# Altium PCB Anlogic Eagle FPGA E104 V2.0封装图.PcbDoc
Units mil, origin at the board's own origin, x right, y up, seen from the top; angles counter-clockwise.
Board outline 3078.86 x 1897.76 mil, 6 copper layers (TOP, L2_GND, L3_S, L4_P, L5_G, BOTTOM), stack 56.8 mil thick; 6 components, 104 nets, 145 pads, 0 vias.
Unrouted connection lines stored in the file: 7.
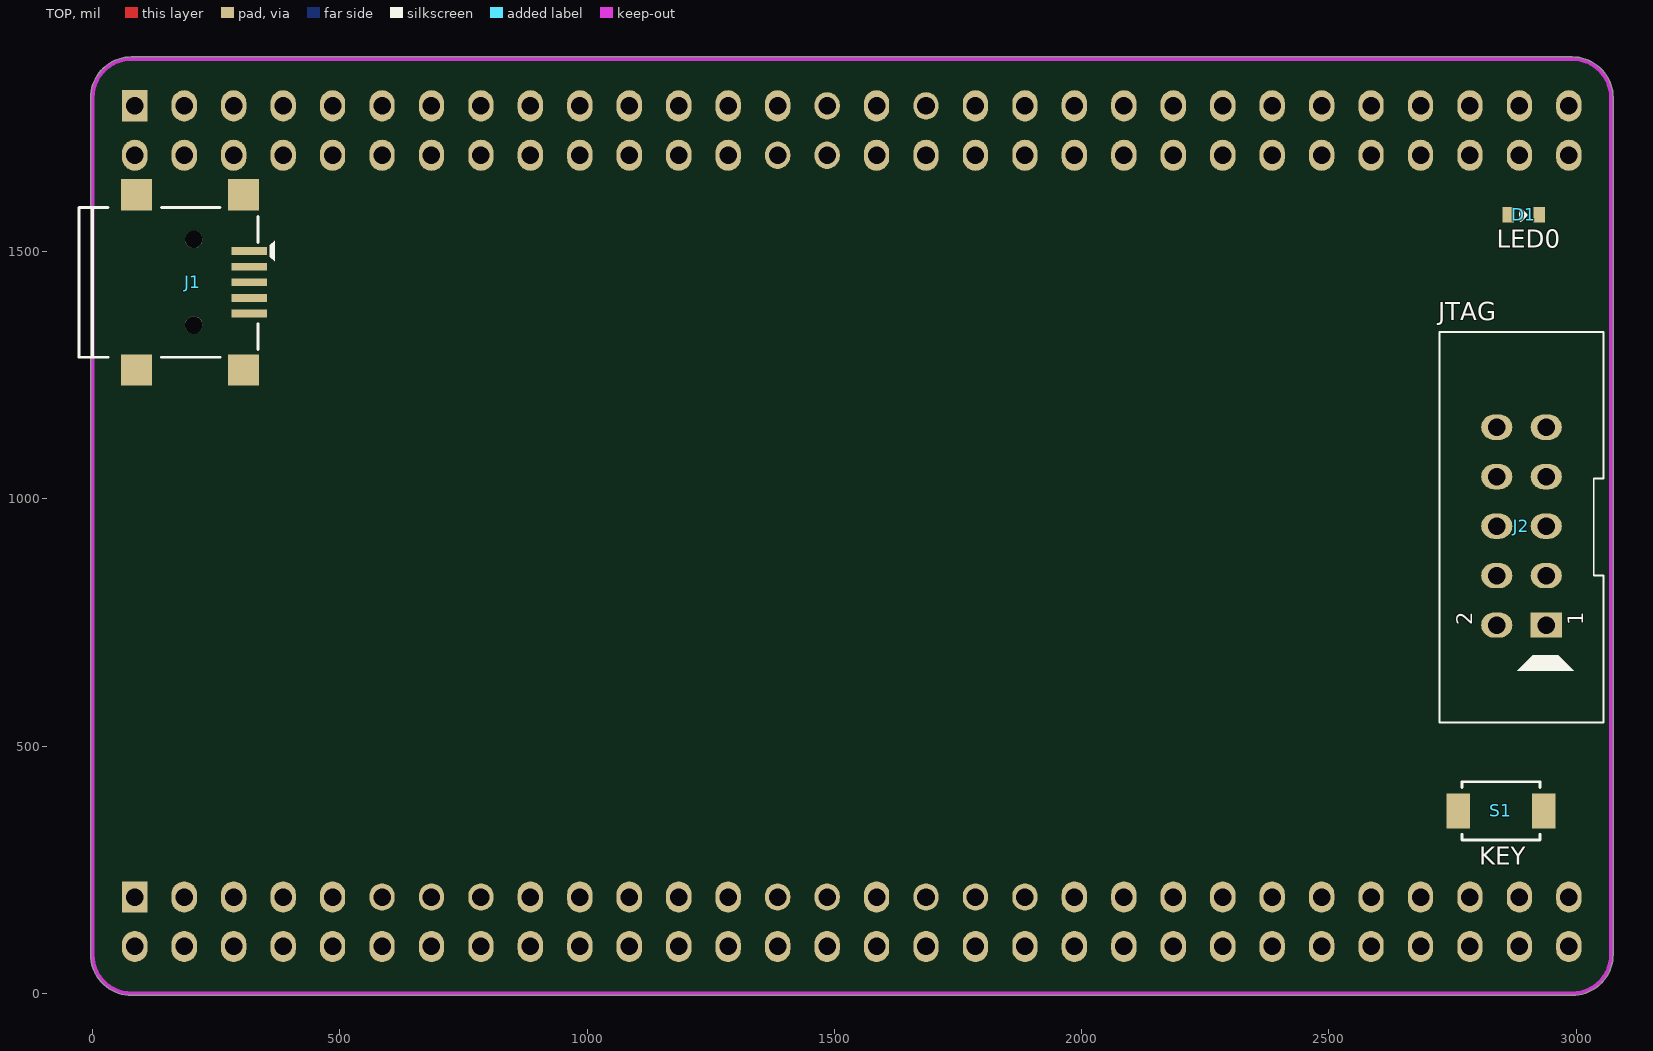
[diagram p0: TOP view]
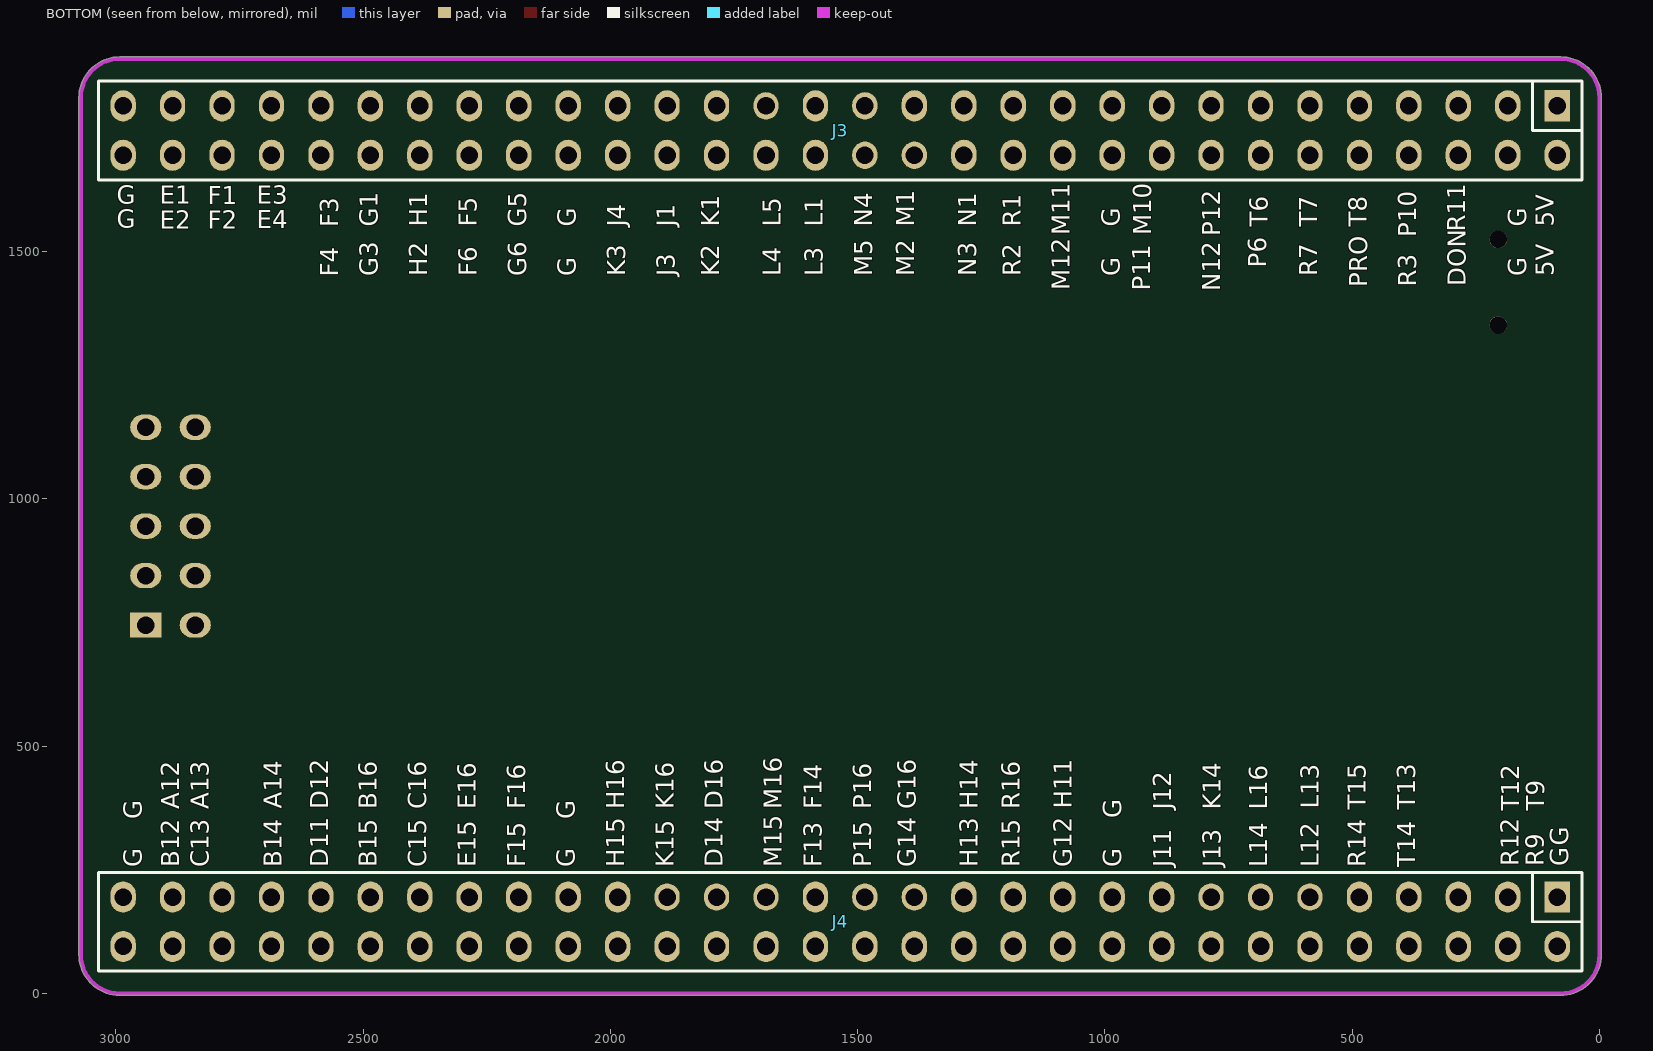
[diagram p1: BOTTOM view, seen from below]
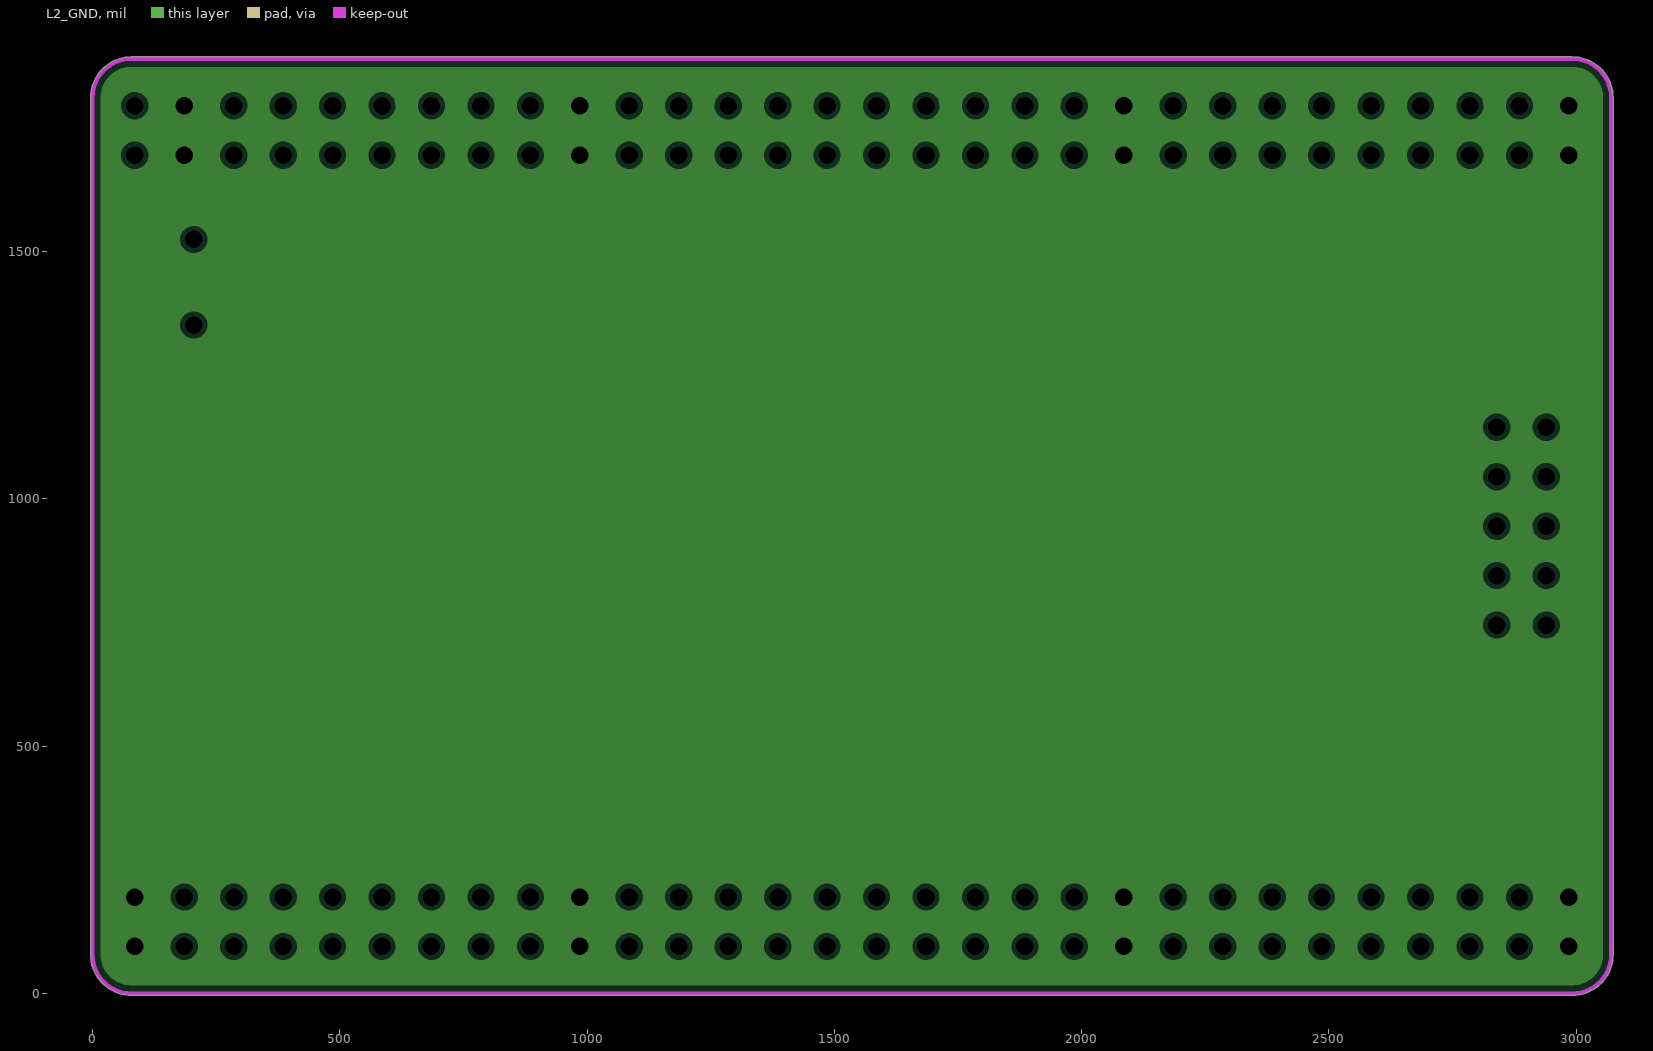
[diagram p2: L2_GND, clearances drawn from the general rule]
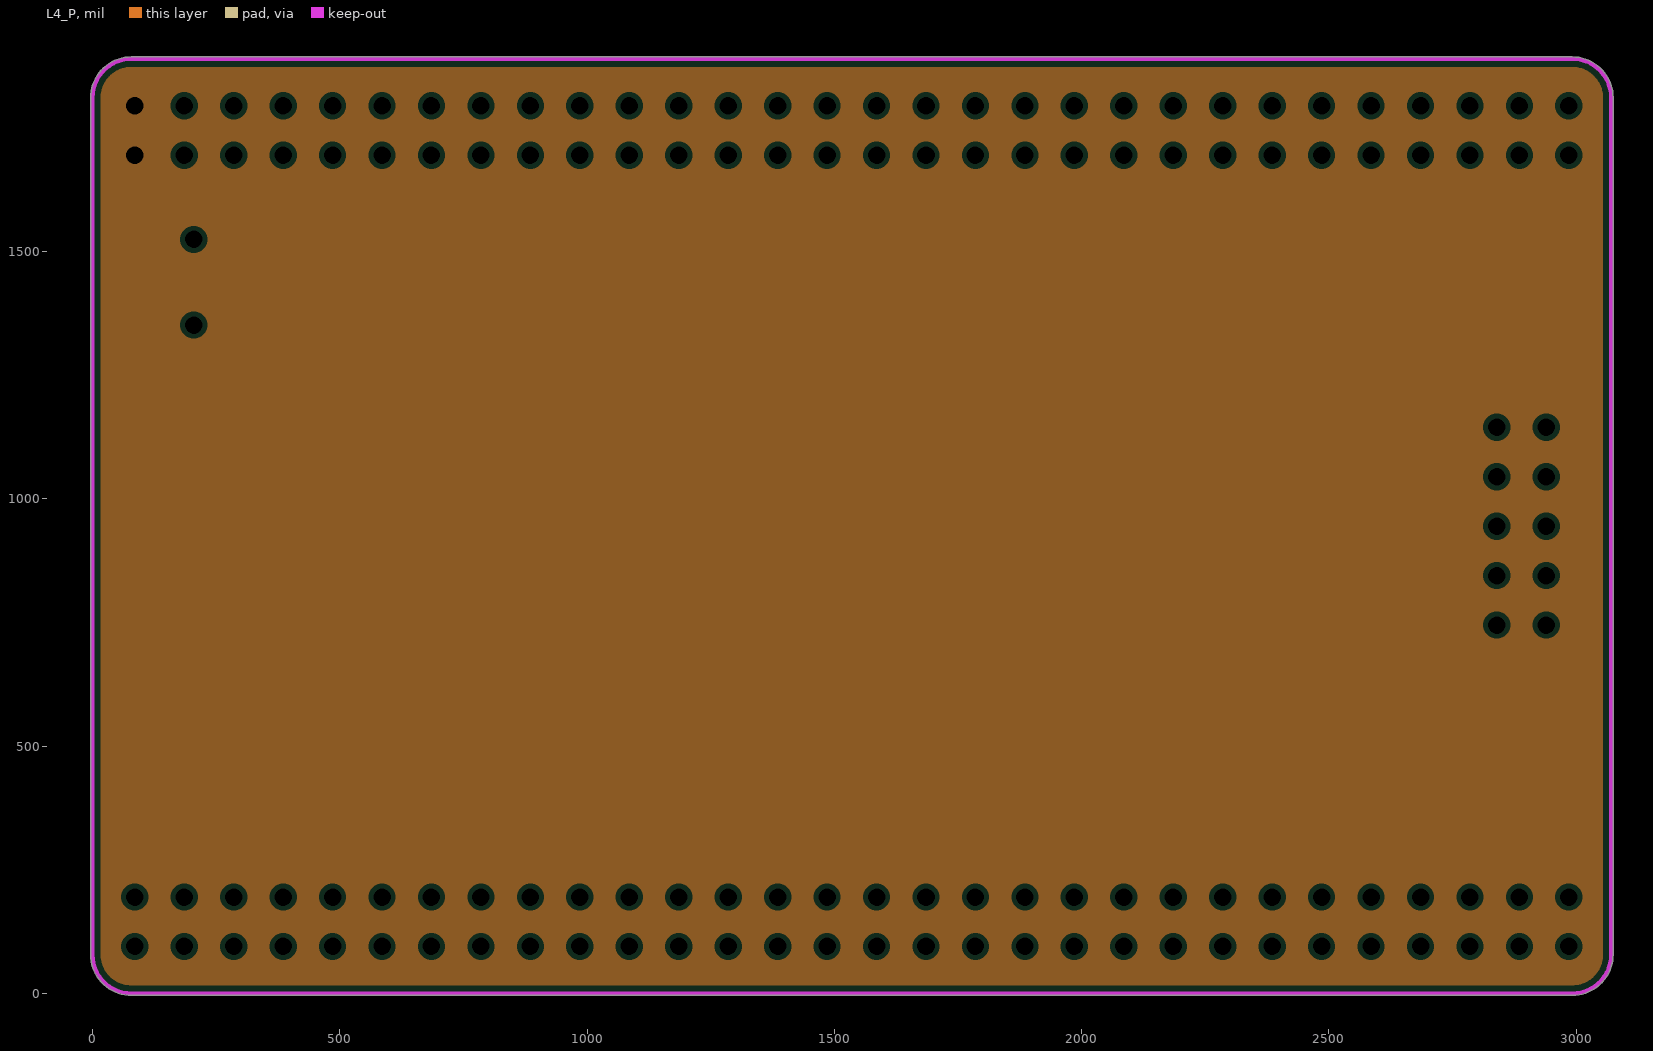
[diagram p3: L4_P, clearances drawn from the general rule]
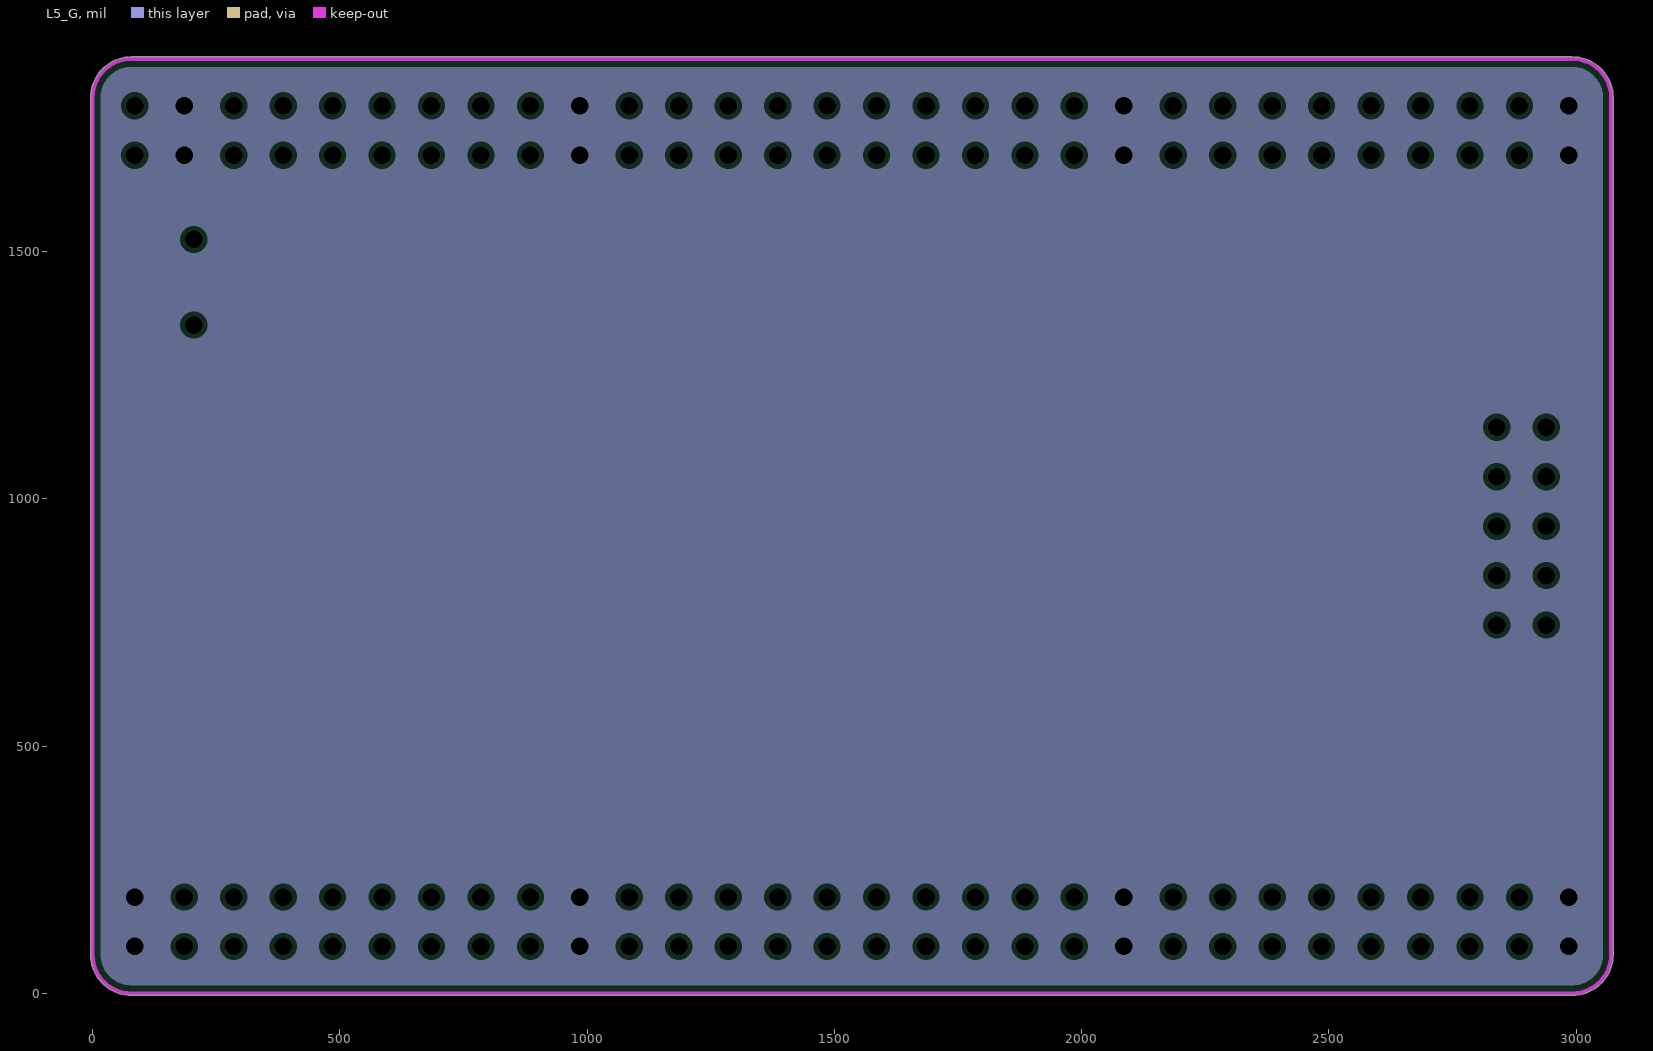
[diagram p4: L5_G, clearances drawn from the general rule]

## Layer stack, top to bottom
TOP: signal copper 1.2
Dielectric: core 3.2, FR-4, Dk 4.5
L2_GND: plane copper 1.4, net GND
Dielectric: prepreg 12.6, FR-4, Dk 4.8
L3_S: signal copper 1.2
Dielectric: core 8, FR-4, Dk 4.5
L4_P: plane copper 1.4, net +5V
Dielectric: prepreg 12.6, FR-4, Dk 4.8
L5_G: plane copper 1.4, net GND
Dielectric: core 12.6, FR-4, Dk 4.8
BOTTOM: signal copper 1.2

## Board outline
-4,78.74 ccw(c78.74,78.74) 78.74,-4 2992.12,-4 ccw(c2992.12,78.74) 3074.86,78.74 3074.86,1811.02 ccw(c2992.12,1811.02) 2992.12,1893.76 78.74,1893.76 ccw(c78.74,1811.02) -4,1811.02

## Design rules (kind name [scope] priority, off if disabled: settings)
Clearance Clearance_1 [IsRegion] p1: gap=13.78
Clearance [All] p2: gap=5
ComponentClearance [All] p1 off: gap=10 collisioncheckmode=3 verticalgap=10 showdistances=FALSE
HoleSize [All] p1: absolutevalues=TRUE maxlimit=320 minlimit=8 maxpercent=80.000 minpercent=20.000
MinimumSolderMaskSliver [All] p1 off: minsoldermaskwidth=10
PlaneClearance [All] p1: clearance=9.84
PlaneConnect [All] p1: planeconnectstyle=Direct reliefexpansion=20 reliefentries=4 reliefconductorwidth=10 reliefairgap=10
PolygonConnect [All] p1: connectstyle=Direct reliefconductorwidth=10 reliefentries=4 polygonreliefangle="90 Angle"
RoutingVias [All] p1: holewidth=8 width=18 viastyle="Through Hole" minholewidth=8 minwidth=18 maxholewidth=160 maxwidth=320
SilkToSilkClearance [All] p1 off: silktosilkclearance=10
SilkscreenOverComponentPads [All] p1 off: minsilkscreentomaskgap=10
SolderMaskExpansion [All] p1 off: expansion=4
Width [All] p1: maxlimit=100 minlimit=4 preferedwidth=5 minimp=52.760000 maximp=52.930000 favimp=44.990000
21 further rules are at their usual default settings.

## Classes and differential pairs
component class "PAGE09 Connectors": J3 J4
component class "PAGE08 System Power": J1
component class "PAGE05 FPGA Config": D1 J2 S1

## Components (designator, comment, footprint, x,y, rotation, side; value= is the part's Value field where it differs from the comment)
D1 "GREEN" Q0603 2894.07,1574.28 r0 top
J1 "MINI USB" MINIUSB-AB-SM 163.19,1437.99 r270 top
J2 "CONN 5x2" DIP10-2P54-I 2888.45,943.7 r90 top
J3 "CONN PLUG 30x2" DIP2X30_2P54#1 1534.43,1744.88 r180 bottom
J4 "CONN PLUG 30x2" DIP2X30_2P54#2 1534.43,144.88 r180 bottom
S1 "FSMRA2JH" SMD_3X4X2MM 2847.98,368.99 r0 top

## Footprints (in the part's own frame and the unit in brackets; to place one, negate y for a bottom-side part, rotate by r counter-clockwise, add the part's x,y. Pads: shape width x height; smd on the part's side, far side on the other; paste and mask are expansions set on the pad)
DIP2X30_2P54#1 [mm] "DIP2X30_2P54"
  rect 1.3x1.6 hole 0.9: 1(36.805,1.27)
  oval 1.3x1.6 hole 0.9: 2(36.805,-1.27) 3(34.265,1.27) 4(34.265,-1.27) 5(31.725,1.27) 6(31.725,-1.27) 7(29.185,1.27) 8(29.185,-1.27) 9(26.645,1.27) 10(26.645,-1.27) 11(24.105,1.27) 12(24.105,-1.27) 13(21.565,1.27) 14(21.565,-1.27) 15(19.025,1.27) 16(19.025,-1.27) 17(16.485,1.27) 18(16.485,-1.27) 19(13.945,1.27) 20(13.945,-1.27) 21(11.405,1.27) 22(11.405,-1.27) 23(8.865,1.27) 24(8.865,-1.27) 25(6.325,1.27) 26(6.325,-1.27) 27(3.785,1.27) 31(-1.295,1.27) 32(-1.295,-1.27) 34(-3.835,-1.27) 35(-6.375,1.27) 36(-6.375,-1.27) 37(-8.915,1.27) 38(-8.915,-1.27) 39(-11.455,1.27) 40(-11.455,-1.27) 41(-13.995,1.27) 42(-13.995,-1.27) 43(-16.535,1.27) 44(-16.535,-1.27) 45(-19.075,1.27) 46(-19.075,-1.27) 47(-21.615,1.27) 48(-21.615,-1.27) 49(-24.155,1.27) 50(-24.155,-1.27) 51(-26.695,1.27) 52(-26.695,-1.27) 53(-29.235,1.27) 54(-29.235,-1.27) 55(-31.775,1.27) 56(-31.775,-1.27) 57(-34.315,1.27) 58(-34.315,-1.27) 59(-36.855,1.27) 60(-36.855,-1.27)
  oval 1.3x1.4 hole 0.9: 28(3.785,-1.27) 29(1.245,1.27) 30(1.245,-1.27) 33(-3.835,1.27)
  silkscreen extent -38.13,-2.54 38.07,2.54
DIP2X30_2P54#2 [mm] "DIP2X30_2P54"
  rect 1.3x1.6 hole 0.9: 1(36.805,1.27)
  oval 1.3x1.6 hole 0.9: 2(36.805,-1.27) 3(34.265,1.27) 4(34.265,-1.27) 5(31.725,1.27) 6(31.725,-1.27) 7(29.185,1.27) 8(29.185,-1.27) 9(26.645,1.27) 10(26.645,-1.27) 12(24.105,-1.27) 14(21.565,-1.27) 16(19.025,-1.27) 17(16.485,1.27) 18(16.485,-1.27) 19(13.945,1.27) 20(13.945,-1.27) 21(11.405,1.27) 22(11.405,-1.27) 23(8.865,1.27) 24(8.865,-1.27) 25(6.325,1.27) 26(6.325,-1.27) 28(3.785,-1.27) 30(1.245,-1.27) 31(-1.295,1.27) 32(-1.295,-1.27) 34(-3.835,-1.27) 36(-6.375,-1.27) 38(-8.915,-1.27) 39(-11.455,1.27) 40(-11.455,-1.27) 41(-13.995,1.27) 42(-13.995,-1.27) 43(-16.535,1.27) 44(-16.535,-1.27) 45(-19.075,1.27) 46(-19.075,-1.27) 47(-21.615,1.27) 48(-21.615,-1.27) 49(-24.155,1.27) 50(-24.155,-1.27) 51(-26.695,1.27) 52(-26.695,-1.27) 53(-29.235,1.27) 54(-29.235,-1.27) 55(-31.775,1.27) 56(-31.775,-1.27) 57(-34.315,1.27) 58(-34.315,-1.27) 59(-36.855,1.27) 60(-36.855,-1.27)
  oval 1.3x1.4 hole 0.9: 11(24.105,1.27) 13(21.565,1.27) 15(19.025,1.27) 27(3.785,1.27) 29(1.245,1.27) 33(-3.835,1.27) 35(-6.375,1.27) 37(-8.915,1.27)
  silkscreen extent -38.13,-2.54 38.07,2.54
DIP10-2P54-I [mm] "DIP10-2P54-I"
  rect 1.3x1.6 hole 0.9: 1(-5.05,-1.3)
  oval 1.3x1.6 hole 0.9: 2(-5.05,1.24) 3(-2.51,-1.3) 4(-2.51,1.24) 5(0.03,-1.3) 6(0.03,1.24) 7(2.57,-1.3) 8(2.57,1.24) 9(5.11,-1.3) 10(5.11,1.24)
  silkscreen extent -10.05,-4.24 10.01,4.18
MINIUSB-AB-SM [mil] "MINIUSB-AB-SM"
  rect 15.75x70.87 smd: 1(-62.99,153.74) 2(-31.5,153.74) 3(0,153.74) 4(31.5,153.74) 5(62.99,153.74)
  rect 63x63 smd: S1(-177.17,141.93) S2(177.17,141.93) S3(-177.17,-74.61) S4(177.17,-74.61)
  round 35.43 hole 35.43: ""(-86.61,41.53) ""(86.61,41.53)
  silkscreen extent -152,-191 152,205
Q0603 [mil] "Q0603"
  rect 23.62x31.5 smd: 1(-31.5,0) 2(31.5,0)
  silkscreen extent -6,-11 5,11
SMD_3X4X2MM [mil] "SMD_3X4X2MM"
  rect 47.24x70.87 smd: 1(-86.61,0) 2(86.61,0)
  silkscreen extent -79,-59 79,59

## Part data
D1: library part LED
J1: library part USB_MINI_AB_RECEPTACLE, "CON 1X5 USB_MICRO_AB_RECEPTACLE RA SMT 0.65MM SP 105H AU"
J2: library part "CONN RCPT 5x2/SM_0"
S1: library part SWITCH_2, "SWITCH TACT RA H=3.86MM 160GF"

## Nets (pads, with @x,y where several pads share a name; then routed paths per layer and width w, separated by ;. In a path a pad name is that pad's centre, name@x,y a point inside that pad or via, vN(x,y) a via of type N, cw(c..) or ccw(c..) an arc to the next point about the centre after c; other vN are vias at no path point)
+5V: J3.1 J3.2
A12_BE16N_0: J4.57
A13_BE17N_0: J4.55
A14_BE19N_GPLL0_CLKIN1_0: J4.53
B12_BE16P_0: J4.58
B14_BE19P_GPLL0_CLKIN0_0: J4.54
B15_L2P_1: J4.50
B16_L2N_1: J4.49
C13_BE17P_0: J4.56
C15_L6P_1: J4.48
C16_L6N_1: J4.47
D11_BE20P_GPLL0_OUTP_0: J4.52
D12_BE20N_GPLL0_OUTN_0: J4.51
D14_L4P_1: J4.36
D16_L4N_1: J4.35
DONE_2: J3.6
E1_R17N_3: J3.57
E2_R17P_3: J3.58
E3_R25N_3: J3.53
E4_R25P_3: J3.54
E15_L7P_1: J4.46
E16_L7N_1: J4.45
F1_R12N_GCLKIOR6_3: J3.55
F2_R12P_GCLKIOR7_3: J3.56
F3_R24N_3: J3.51
F4_R24P_3: J3.52
F5_R26N_3: J3.45
F6_R26P_3: J3.46
F13_L5P_1: J4.32
F14_L5N_1: J4.31
F15_L8P_1: J4.44
F16_L8N_1: J4.43
G1_R11N_3: J3.49
G3_R11P_3: J3.50
G5_R22N_3: J3.43
G6_R22P_3: J3.44
G12_L11P_1: J4.22
G14_L9P_1: J4.28
G16_L9N_1: J4.27
GND: J3.3 J3.4 J3.19 J3.20 J3.41 J3.42 J3.59 J3.60 J4.1 J4.2 J4.19 J4.20 J4.41 J4.42 J4.59 J4.60
H1_R10N_3: J3.47
H2_R10P_3: J3.48
H11_L11N_1: J4.21
H13_L12P_1: J4.26
H14_L12N_1: J4.25
H15_L10P_1: J4.40
H16_L10N_1: J4.39
J1_R9N_3: J3.37
J3_R9P_3: J3.38
J4_R13N_GCLKIOR4_3: J3.39
J11_L13P_GCLKIOL7_1: J4.18
J12_L13N_GCLKIOL6_1: J4.17
J13_L14P_GCLKIOL5_1: J4.16
K1_R8N_3: J3.35
K2_R8P_3: J3.36
K3_R13P_GCLKIOR5_3: J3.40
K14_L14N_GCLKIOL4_1: J4.15
K15_L17P_1: J4.38
K16_L17N_1: J4.37
L1_R7N_3: J3.31
L3_R7P_3: J3.32
L4_R16P_3: J3.34
L5_R16N_3: J3.33
L12_L26P_1: J4.12
L13_L26N_1: J4.11
L14_L20P_1: J4.14
L16_L20N_1: J4.13
M1_R6N_3: J3.27
M2_R6P_3: J3.28
M5_R2P_3: J3.30
M10_IO_ADC_CH3_2: J3.17
M11_TE2N_PLL_ADC_CH7_2: J3.21
M12_TE2P_PLL_ADC_CH4_2: J3.22
M15_L19P_1: J4.34
M16_L19N_1: J4.33
N1_R5N_3: J3.25
N3_R5P_3: J3.26
N4_R2N_3: J3.29
N12_TE4P_ADC_CH5_2: J3.16
P6_TE13P_2: J3.14
P10_IO_DIN_MISO_2: J3.7
P11_IO_ADC_CH2_2: J3.18
P12_TE4N_ADC_CH6_2: J3.15
P15_L21P_1: J4.30
P16_L21N_1: J4.29
PROGRAM_B_2: J3.10
R1_R3N_GPLL2_CLKIN1_3: J3.23
R2_R3P_GPLL2_CLKIN0_3: J3.24
R3_IO_INIT_B_2: J3.8
R7_TE12P_GCLKIOT5_2: J3.12
R9_TE8P_2: J4.4
R11_IO_CCLK_2: J3.5
R12_L25P_1: J4.6
R14_L23P_1: J4.10
R15_L22P_1: J4.24
R16_L22N_1: J4.23
T6_TE13N_2: J3.13
T7_TE12N_GCLKIOT4_2: J3.11
T8_IO_GCLKIOT0_2: J3.9
T9_TE8N_2: J4.3
T12_L25N_1: J4.5
T13_L24N_1: J4.7
T14_L24P_1: J4.8
T15_L23N_1: J4.9
pads on no net: D1.1 D1.2 J1. J1.1 J1.2 J1.3 J1.4 J1.5 J1.S1 J1.S2 J1.S3 J1.S4 J2.1 J2.2 J2.3 J2.4 J2.5 J2.6 J2.7 J2.8 J2.9 J2.10 S1.1 S1.2

## Polygon pours and split planes (outlines as drawn)
GND on L2_GND (split plane): 78.74,1873.66 2992.12,1873.66 2992.74,1873.72 2999.14,1873.36 3006.08,1872.19 3012.84,1870.24 3019.34,1867.55 3025.5,1864.14 3031.24,1860.07 3036.48,1855.38 3041.17,1850.14 3045.24,1844.4 3048.65,1838.24 3051.34,1831.74 3053.29,1824.98 3054.46,1818.04 3054.82,1811.64 3054.76,1811.02 3054.76,78.74 3054.82,78.12 3054.46,71.72 3053.29,64.78 3051.34,58.02 3048.65,51.52 3045.24,45.36 3041.17,39.62 3036.48,34.38 3031.24,29.69 3025.5,25.62 3019.34,22.21 3012.84,19.52 3006.08,17.57 2999.14,16.4 2992.74,16.04 2992.12,16.1 78.74,16.1 78.12,16.04 71.72,16.4 64.78,17.57 58.02,19.52 51.52,22.21 45.36,25.62 39.62,29.69 34.38,34.38 29.69,39.62 25.62,45.36 22.21,51.52 19.52,58.02 17.57,64.78 16.4,71.72 16.04,78.12 16.1,78.74 16.1,1811.02 16.04,1811.64 16.4,1818.04 17.57,1824.98 19.52,1831.74 22.21,1838.24 25.62,1844.4 29.69,1850.14 34.38,1855.38 39.62,1860.07 45.36,1864.14 51.52,1867.55 58.02,1870.24 64.78,1872.19 71.72,1873.36 78.12,1873.72
+5V on L4_P (split plane): 78.74,1873.66 2992.12,1873.66 2992.74,1873.72 2999.14,1873.36 3006.08,1872.19 3012.84,1870.24 3019.34,1867.55 3025.5,1864.14 3031.24,1860.07 3036.48,1855.38 3041.17,1850.14 3045.24,1844.4 3048.65,1838.24 3051.34,1831.74 3053.29,1824.98 3054.46,1818.04 3054.82,1811.64 3054.76,1811.02 3054.76,78.74 3054.82,78.12 3054.46,71.72 3053.29,64.78 3051.34,58.02 3048.65,51.52 3045.24,45.36 3041.17,39.62 3036.48,34.38 3031.24,29.69 3025.5,25.62 3019.34,22.21 3012.84,19.52 3006.08,17.57 2999.14,16.4 2992.74,16.04 2992.12,16.1 78.74,16.1 78.12,16.04 71.72,16.4 64.78,17.57 58.02,19.52 51.52,22.21 45.36,25.62 39.62,29.69 34.38,34.38 29.69,39.62 25.62,45.36 22.21,51.52 19.52,58.02 17.57,64.78 16.4,71.72 16.04,78.12 16.1,78.74 16.1,1811.02 16.04,1811.64 16.4,1818.04 17.57,1824.98 19.52,1831.74 22.21,1838.24 25.62,1844.4 29.69,1850.14 34.38,1855.38 39.62,1860.07 45.36,1864.14 51.52,1867.55 58.02,1870.24 64.78,1872.19 71.72,1873.36 78.12,1873.72
GND on L5_G (split plane): 78.74,1873.66 2992.12,1873.66 2992.74,1873.72 2999.14,1873.36 3006.08,1872.19 3012.84,1870.24 3019.34,1867.55 3025.5,1864.14 3031.24,1860.07 3036.48,1855.38 3041.17,1850.14 3045.24,1844.4 3048.65,1838.24 3051.34,1831.74 3053.29,1824.98 3054.46,1818.04 3054.82,1811.64 3054.76,1811.02 3054.76,78.74 3054.82,78.12 3054.46,71.72 3053.29,64.78 3051.34,58.02 3048.65,51.52 3045.24,45.36 3041.17,39.62 3036.48,34.38 3031.24,29.69 3025.5,25.62 3019.34,22.21 3012.84,19.52 3006.08,17.57 2999.14,16.4 2992.74,16.04 2992.12,16.1 78.74,16.1 78.12,16.04 71.72,16.4 64.78,17.57 58.02,19.52 51.52,22.21 45.36,25.62 39.62,29.69 34.38,34.38 29.69,39.62 25.62,45.36 22.21,51.52 19.52,58.02 17.57,64.78 16.4,71.72 16.04,78.12 16.1,78.74 16.1,1811.02 16.04,1811.64 16.4,1818.04 17.57,1824.98 19.52,1831.74 22.21,1838.24 25.62,1844.4 29.69,1850.14 34.38,1855.38 39.62,1860.07 45.36,1864.14 51.52,1867.55 58.02,1870.24 64.78,1872.19 71.72,1873.36 78.12,1873.72

## Keep-outs
Keep-Out Layer:
  lines w8: 0,78.74 ccw(c78.74,78.74) 78.74,0 2992.12,0 ccw(c2992.12,78.74) 3070.86,78.74 3070.86,1811.02 ccw(c2992.12,1811.02) 2992.12,1889.76 78.74,1889.76 ccw(c78.74,1811.02) 0,1811.02 0,78.74

## Other copper
BOTTOM:
  pour cut-out: 3014.17,240.36 3029.17,225.36 3029.17,65.36 3014.17,50.36 54.17,50.36 39.17,65.36 39.17,225.36 54.17,240.36
  pour cut-out: 3014.17,1840.36 3029.17,1825.36 3029.17,1665.36 3014.17,1650.36 54.17,1650.36 39.17,1665.36 39.17,1825.36 54.17,1840.36

## Silkscreen, mask and mechanical layers (free items; w line width, h text height)
Top Overlay:
  text "LED0" at 2839.43,1507.89 h36
  text "JTAG" at 2721.43,1360.89 h36
  text "KEY" at 2804.43,259.89 h36
Bottom Overlay:
  text "E3" at 2715.43,1596.89 h36
  text "E1" at 2911.43,1596.89 h36
  text "G" at 2998.43,1596.89 h36
  text "F1" at 2814.43,1595.89 h36
  text "5V" at 92.43,1549.89 h36 r270
  text "G" at 148.43,1549.89 h36 r270
  text "T8" at 470.43,1549.89 h36 r270
  text "T7" at 570.43,1549.89 h36 r270
  text "T6" at 670.43,1549.89 h36 r270
  text "G" at 970.43,1549.89 h36 r270
  text "R1" at 1170.43,1549.89 h36 r270
  text "N1" at 1260.43,1549.89 h36 r270
  text "M1" at 1385.43,1549.89 h36 r270
  text "N4" at 1470.43,1549.89 h36 r270
  text "L1" at 1570.43,1549.89 h36 r270
  text "L5" at 1655.43,1549.89 h36 r270
  text "K1" at 1780.43,1549.89 h36 r270
  text "J1" at 1870.43,1549.89 h36 r270
  text "J4" at 1970.43,1549.89 h36 r270
  text "G" at 2070.43,1549.89 h36 r270
  text "G5" at 2170.43,1549.89 h36 r270
  text "F5" at 2270.43,1549.89 h36 r270
  text "H1" at 2370.43,1549.89 h36 r270
  text "G1" at 2470.43,1549.89 h36 r270
  text "F3" at 2550.43,1548.89 h36 r270
  text "G" at 2998.43,1547.89 h36
  text "E4" at 2715.43,1546.89 h36
  text "F2" at 2814.43,1545.89 h36
  text "E2" at 2911.43,1545.89 h36
  text "R11" at 271.43,1539.89 h36 r270
  text "M10" at 906.43,1532.89 h36 r270
  text "M11" at 1071.43,1532.89 h36 r270
  text "P12" at 766.43,1530.89 h36 r270
  text "P10" at 370.43,1528.89 h36 r270
  text "P6" at 673.43,1467.89 h36 r270
  text "5V" at 92.43,1449.89 h36 r270
  text "G" at 148.43,1449.89 h36 r270
  text "R7" at 570.43,1449.89 h36 r270
  text "G" at 970.43,1449.89 h36 r270
  text "R2" at 1170.43,1449.89 h36 r270
  text "N3" at 1260.43,1449.89 h36 r270
  text "M2" at 1385.43,1449.89 h36 r270
  text "M5" at 1470.43,1449.89 h36 r270
  text "L3" at 1570.43,1449.89 h36 r270
  text "L4" at 1655.43,1449.89 h36 r270
  text "K2" at 1780.43,1449.89 h36 r270
  text "J3" at 1870.43,1449.89 h36 r270
  text "K3" at 1970.43,1449.89 h36 r270
  text "G" at 2070.43,1449.89 h36 r270
  text "G6" at 2170.43,1449.89 h36 r270
  text "F6" at 2270.43,1449.89 h36 r270
  text "H2" at 2370.43,1449.89 h36 r270
  text "G3" at 2470.43,1449.89 h36 r270
  text "F4" at 2550.43,1448.89 h36 r270
  text "DON" at 270.43,1429.89 h36 r270
  text "R3" at 370.43,1428.89 h36 r270
  text "PRO" at 469.43,1427.89 h36 r270
  text "M12" at 1071.43,1421.89 h36 r270
  text "P11" at 908.43,1420.89 h36 r270
  text "N12" at 766.43,1419.89 h36 r270
  text "H11" at 1067.43,373.89 h36 r270
  text "L13" at 567.43,372.89 h36 r270
  text "A14" at 2665,372.89 h36 r270
  text "R16" at 1172.43,371.89 h36 r270
  text "H14" at 1257.43,371.89 h36 r270
  text "G16" at 1382.43,371.89 h36 r270
  text "P16" at 1472.43,371.89 h36 r270
  text "F14" at 1572.43,371.89 h36 r270
  text "M16" at 1653.43,371.89 h36 r270
  text "D16" at 1772.43,371.89 h36 r270
  text "K16" at 1872.43,371.89 h36 r270
  text "H16" at 1972.43,371.89 h36 r270
  text "F16" at 2172.43,371.89 h36 r270
  text "E16" at 2272.43,371.89 h36 r270
  text "C16" at 2372.43,371.89 h36 r270
  text "B16" at 2472.43,371.89 h36 r270
  text "D12" at 2570.43,371.89 h36 r270
  text "A13" at 2812.43,371.89 h36 r270
  text "A12" at 2872.43,371.89 h36 r270
  text "T13" at 372.43,370.89 h36 r270
  text "T15" at 472.43,370.89 h36 r270
  text "L16" at 671.43,370.89 h36 r270
  text "K14" at 765.43,370.89 h36 r270
  text "J12" at 866.43,370.89 h36 r270
  text "T9" at 111.43,368.89 h36 r270
  text "T12" at 162.43,368.89 h36 r270
  text "G" at 967.43,353.89 h36 r270
  text "G" at 2072.43,351.89 h36 r270
  text "G" at 2947.43,351.89 h36 r270
  text "G" at 63.43,298.89 h36 r270
  text "G" at 63.43,256.89 h36 r270
  text "R9" at 112.43,256.89 h36 r270
  text "R12" at 163.43,256.89 h36 r270
  text "T14" at 372.43,255.36 h36 r270
  text "R14" at 472.43,255.36 h36 r270
  text "L12" at 567.43,255.36 h36 r270
  text "L14" at 671.43,255.36 h36 r270
  text "J13" at 765.43,255.36 h36 r270
  text "J11" at 866.43,255.36 h36 r270
  text "G" at 967.43,255.36 h36 r270
  text "G12" at 1067.43,255.36 h36 r270
  text "R15" at 1172.43,255.36 h36 r270
  text "H13" at 1257.43,255.36 h36 r270
  text "G14" at 1382.43,255.36 h36 r270
  text "P15" at 1472.43,255.36 h36 r270
  text "F13" at 1572.43,255.36 h36 r270
  text "M15" at 1653.43,255.36 h36 r270
  text "D14" at 1772.43,255.36 h36 r270
  text "K15" at 1872.43,255.36 h36 r270
  text "H15" at 1972.43,255.36 h36 r270
  text "G" at 2072.43,255.36 h36 r270
  text "F15" at 2172.43,255.36 h36 r270
  text "E15" at 2272.43,255.36 h36 r270
  text "C15" at 2372.43,255.36 h36 r270
  text "B15" at 2472.43,255.36 h36 r270
  text "D11" at 2570.43,255.36 h36 r270
  text "B14" at 2665,255.36 h36 r270
  text "C13" at 2812.43,255.36 h36 r270
  text "B12" at 2872.43,255.36 h36 r270
  text "G" at 2947.43,255.36 h36 r270

## Dimensions
78.74,1889.76 to 78.74,0 on Top Overlay
0,78.74 to 3070.86,78.74 on Top Overlay
2985.43,1694.88 to 2985.43,194.88 on Top Overlay
2985.43,94.88 to 2985.43,194.88 on Top Overlay

## Text inside footprints (layer, text, board x,y; h text height)
J2: Top Overlay "2" at 2789.63,744.88 h31 r90; Top Overlay "1" at 3014.43,744.88 h31 r90